# Allegro board demoa2.brd
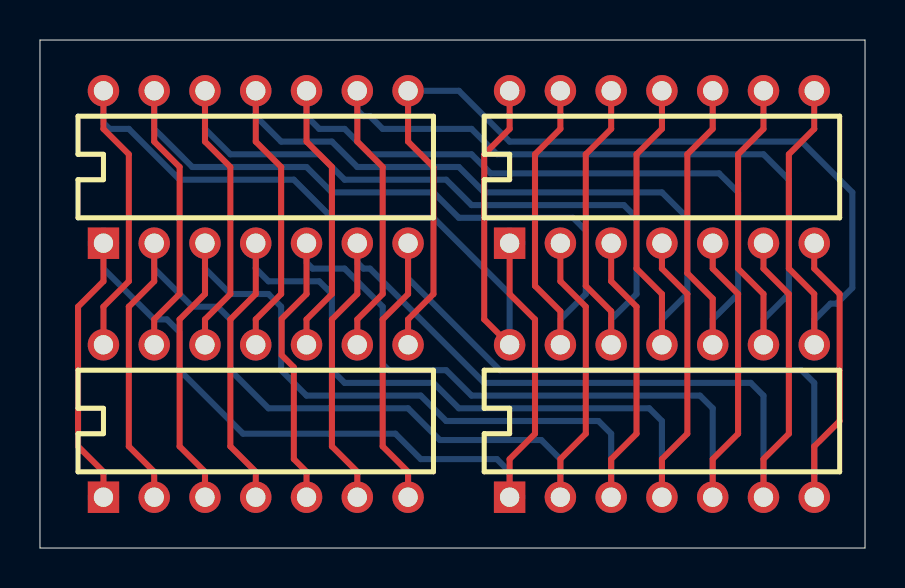
[diagram p0: board, top side]
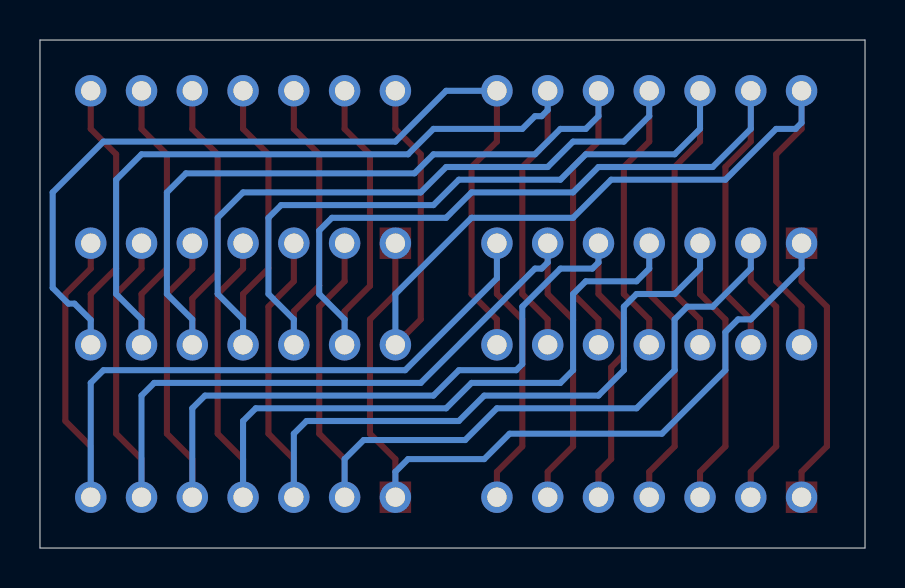
[diagram p1: board, bottom side, seen from below]

Outline 41.27 x 25.4 mm; copper layers: TOP, GND, POWER, INNER1, INNER2, BOTTOM. Coordinates in mm from the lower left corner of the outline.
Outline path: 0,25.4 0,0 41.27,0 41.27,25.4 0,25.4

## Design rules (mm)
nets with their own width: min track width 0.305; nets DAT1 DAT2 DAT3 DAT4 DAT5 DAT6 DAT7 DAT8 DAT9 DAT10 DAT11 DAT12 GND VCC

## Placement (name value [footprint] x y rotation side)
U1  7400  [DIP14]  3.17 15.24 0 top
U2  7400  [DIP14]  23.5 15.24 0 top
U3  7400  [DIP14]  3.17 2.54 0 top
U4  7400  [DIP14]  23.5 2.54 0 top

## Library data of the parts
U1-U4 = 7400

## Footprints (pads in the part's own frame, mm; a bottom-side part is the same pattern mirrored in y, then rotated)
DIP14
  rect 1.575x1.575 hole 0.965: 1(0,0)
  round 1.575 hole 0.965: 2(2.54,0) 3(5.08,0) 4(7.62,0) 5(10.16,0) 6(12.7,0) 7(15.24,0) 8(15.24,7.62) 9(12.7,7.62) 10(10.16,7.62) 11(7.62,7.62) 12(5.08,7.62) 13(2.54,7.62) 14(0,7.62)

## Nets
GND: U1.7(TP-7) U2.7(TP-7) U3.7(TP-7) U4.7(TP-7)
VCC: U1.14(TP-14) U2.14(TP-14) U3.14(TP-14) U4.14(TP-14)
DAT1: U1.2(TP-2) U2.2(TP-2) U3.2(TP-2) U4.2(TP-2)
DAT2: U1.1(TP-1) U2.1(TP-1) U3.1(TP-1) U4.1(TP-1)
DAT3: U1.3(TP-3) U2.3(TP-3) U3.3(TP-3) U4.3(TP-3)
DAT4: U1.5(TP-5) U2.5(TP-5) U3.5(TP-5) U4.5(TP-5)
DAT5: U1.4(TP-4) U2.4(TP-4) U3.4(TP-4) U4.4(TP-4)
DAT6: U1.6(TP-6) U2.6(TP-6) U3.6(TP-6) U4.6(TP-6)
DAT7: U1.10(TP-10) U2.10(TP-10) U3.10(TP-10) U4.10(TP-10)
DAT8: U1.9(TP-9) U2.9(TP-9) U3.9(TP-9) U4.9(TP-9)
DAT9: U1.8(TP-8) U2.8(TP-8) U3.8(TP-8) U4.8(TP-8)
DAT10: U1.13(TP-13) U2.13(TP-13) U3.13(TP-13) U4.13(TP-13)
DAT11: U1.12(TP-12) U2.12(TP-12) U3.12(TP-12) U4.12(TP-12)
DAT12: U1.11(TP-11) U2.11(TP-11) U3.11(TP-11) U4.11(TP-11)

## Routing (per net, layer and track width the routed paths; a pad name or vN(x,y) marks a point on that pad's centre or on a via; arc(x,y) is an arc through that point)
GND: length 57.5
  TOP w0.305: U4.7 38.73,5.08 40,6.35 40,12.7 38.73,13.97 U2.7 ; U1.7 18.42,12.7 17.15,11.43 17.15,5.08 18.42,3.81 U3.7
  BOTTOM w0.305: U1.7 18.42,13.48 23,8.89 38.1,8.89 38.73,8.26 U4.7
VCC: length 55.5
  TOP w0.305: 3.17,10.79 3.17,12.06 4.45,13.34 4.45,19.68 3.17,20.95 U1.14 3.17,23.5 ; U4.14 22.23,11.43 22.23,19.68 23.5,20.95 U2.14
  BOTTOM w0.305: U4.14 23.5,12.7 19.69,16.51 14.61,16.51 12.7,18.41 6.98,18.41 4.45,20.95 3.48,20.95 3.17,21.26 U1.14
DAT1: length 56.4
  TOP w0.305: U1.2 5.71,13.34 4.45,12.06 4.45,5.08 5.71,3.81 U3.2 ; U2.2 26.04,13.34 27.31,12.06 27.31,5.71 26.04,4.45 U4.2
  BOTTOM w0.305: U1.2 5.71,13.97 7.62,12.06 8.89,12.06 9.53,11.43 9.53,8.89 11.43,6.99 18.42,6.99 20,5.4 25.08,5.4 26.04,4.45 U4.2
DAT2: length 55.7
  TOP w0.305: U4.1 23.5,4.45 24.77,5.71 24.77,11.43 23.5,12.7 U2.1 ; U1.1 3.17,13.34 1.91,12.06 1.91,5.08 3.17,3.81 U3.1
  BOTTOM w0.305: U4.1 23.5,3.81 22.86,4.45 19.05,4.45 17.78,5.71 10.16,5.71 6.98,8.89 6.98,10.79 6.35,11.43 5.71,11.43 3.17,13.97 U1.1
DAT3: length 57.5
  TOP w0.305: U1.3 8.26,12.7 6.98,11.43 6.98,5.08 8.26,3.81 U3.3 ; U4.3 28.58,4.45 29.85,5.71 29.85,12.06 28.58,13.34 U2.3
  BOTTOM w0.305: U1.3 8.26,13.97 9.53,12.7 11.43,12.7 12.06,12.06 12.06,8.89 13.33,7.62 19.05,7.62 20.32,6.35 27.94,6.35 28.58,5.71 U4.3
DAT4: length 57.9
  TOP w0.305: U3.5 13.33,3.81 12.7,4.45 12.7,9.03 12.09,9.64 12.09,11.46 13.33,12.7 U1.5 ; U2.5 33.66,13.97 34.92,12.7 34.92,5.71 33.66,4.45 U4.5
  BOTTOM w0.305: U1.5 13.33,14.27 13.64,13.97 15.24,13.97 17.15,12.06 17.15,9.19 17.45,8.89 20.32,8.89 21.59,7.62 33.02,7.62 33.66,6.99 U4.5
DAT5: length 58.3
  TOP w0.305: U1.4 10.79,12.7 9.53,11.43 9.53,5.08 10.79,3.81 U3.4 ; U2.4 31.12,13.97 32.38,12.7 32.38,5.71 31.12,4.45 U4.4
  BOTTOM w0.305: U1.4 10.79,13.97 11.43,13.34 13.97,13.34 14.61,12.7 14.61,8.89 15.24,8.26 19.69,8.26 20.96,6.99 30.48,6.99 31.12,6.35 U4.4
DAT6: length 56.6
  TOP w0.305: U2.6 36.2,13.97 37.46,12.7 37.46,5.71 36.2,4.45 U4.6 ; U1.6 15.88,12.7 14.61,11.43 14.61,5.08 15.88,3.81 U3.6
  BOTTOM w0.305: U4.6 36.2,7.62 35.56,8.26 22.23,8.26 16.51,13.97 16.18,13.97 15.88,14.27 U1.6
DAT7: length 60.1
  TOP w0.305: U1.10 13.33,20.32 14.61,19.05 14.61,12.7 13.33,11.43 U3.10 ; U2.10 33.66,20.95 32.38,19.68 32.38,13.74 33.66,12.47 U4.10
  BOTTOM w0.305: U4.10 33.66,11.43 34.92,12.7 34.92,17.78 33.97,18.73 22.54,18.73 21.59,19.68 16.51,19.68 15.24,20.95 13.97,20.95 13.33,21.59 U1.10
DAT8: length 60.3
  TOP w0.305: U3.9 15.88,11.43 17.15,12.7 17.15,19.05 15.88,20.32 U1.9 ; U2.9 36.2,20.95 34.92,19.68 34.92,13.97 36.2,12.7 U4.9
  BOTTOM w0.305: U4.9 36.2,11.43 37.46,12.7 37.46,18.41 36.2,19.68 22.86,19.68 21.59,20.95 17.15,20.95 16.51,21.59 16.18,21.59 15.88,21.89 U1.9
DAT9: length 60.4
  TOP w0.305: U3.8 18.42,11.43 19.69,12.7 19.69,19.05 18.42,20.32 U1.8 ; U4.8 38.73,12.7 37.46,13.97 37.46,19.68 38.73,20.95 U2.8
  BOTTOM w0.305: U1.8 20.96,22.86 23.5,20.32 38.1,20.32 40.64,17.78 40.64,13 39.85,12.22 39.55,12.22 38.73,11.4 U4.8
DAT10: length 59.3
  TOP w0.305: U2.13 26.04,20.95 24.77,19.68 24.77,13.11 26.04,11.84 U4.13 ; U1.13 5.71,20.32 6.98,19.05 6.98,12.7 5.71,11.43 U3.13
  BOTTOM w0.305: U1.13 5.71,20.95 7.62,19.05 13.33,19.05 14.61,17.78 19.69,17.78 20.96,16.51 26.67,16.51 27.31,15.88 27.31,12.7 26.04,11.43 U4.13
DAT11: length 59.7
  TOP w0.305: U2.12 28.58,20.95 27.31,19.68 27.31,13.11 28.58,11.84 U4.12 ; U3.12 8.26,11.43 9.53,12.7 9.53,19.05 8.26,20.32 U1.12
  BOTTOM w0.305: U4.12 28.58,11.43 29.85,12.7 29.85,16.51 29.21,17.14 21.59,17.14 20.32,18.41 15.24,18.41 13.97,19.68 9.53,19.68 8.26,20.95 U1.12
DAT12: length 59.3
  TOP w0.305: U3.11 10.79,11.43 12.06,12.7 12.06,19.05 10.79,20.32 U1.11 ; U2.11 31.12,20.95 29.85,19.68 29.85,13.97 31.12,12.7 U4.11
  BOTTOM w0.305: U4.11 31.12,11.43 32.38,12.7 32.38,16.51 31.12,17.78 22.23,17.78 20.96,19.05 15.88,19.05 14.61,20.32 12.06,20.32 10.79,21.59 U1.11
